# Altium PCB MIXR - Power.PcbDoc (part 1 of 4)
Units mm, origin at the board's own origin, x right, y up, seen from the top; angles counter-clockwise.
Board outline 109.43 x 109.43 mm, 2 copper layers (Top Layer, Bottom Layer), stack 1.569 mm thick; 131 components, 82 nets, 420 pads, 247 vias.
Unrouted connection lines stored in the file: 102.
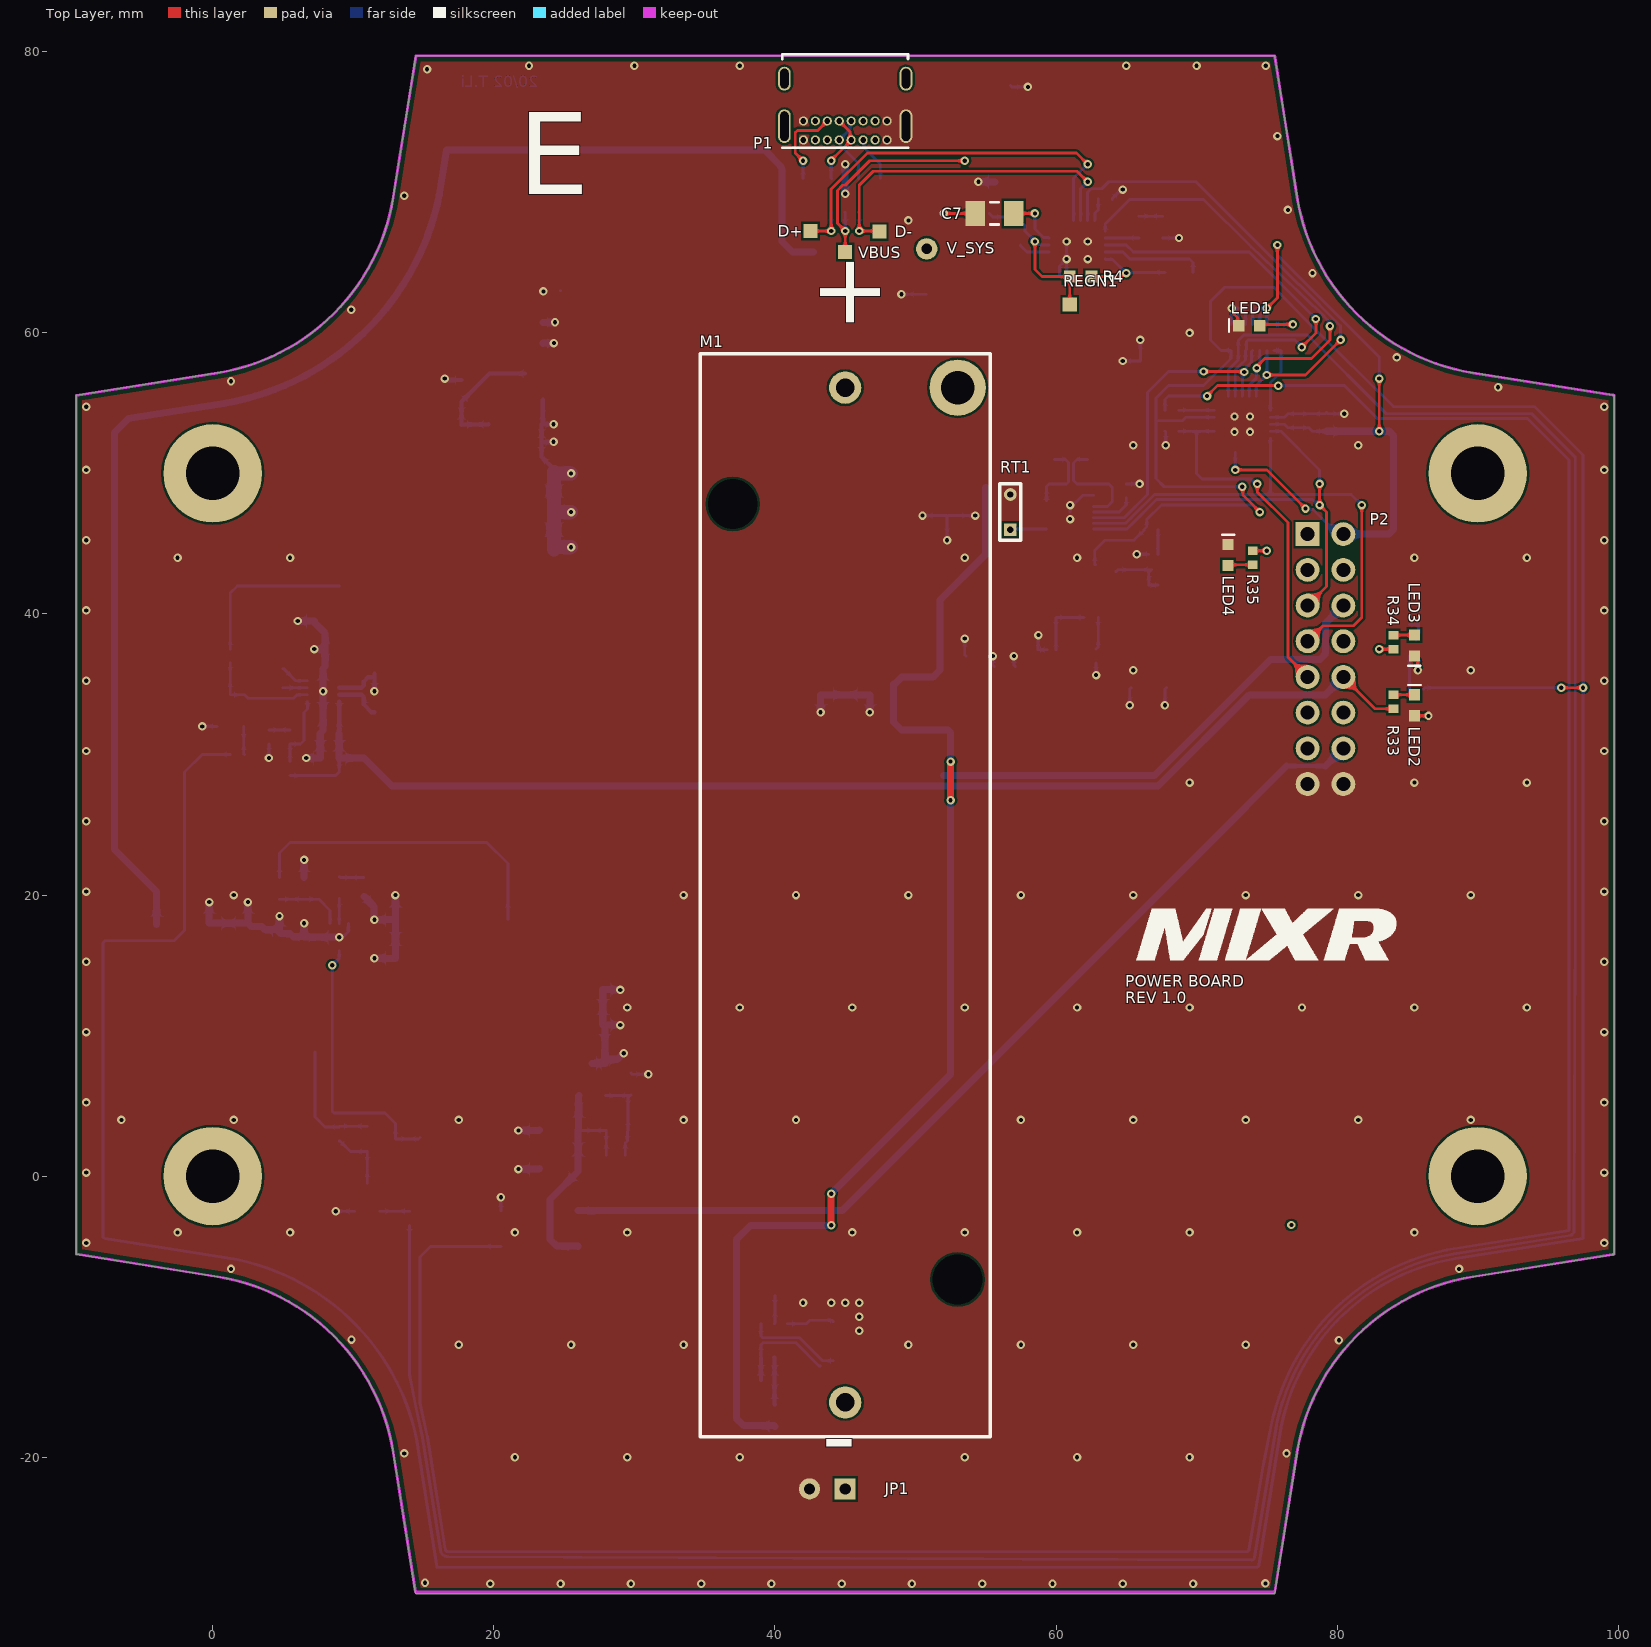
[diagram p0: Top Layer view]
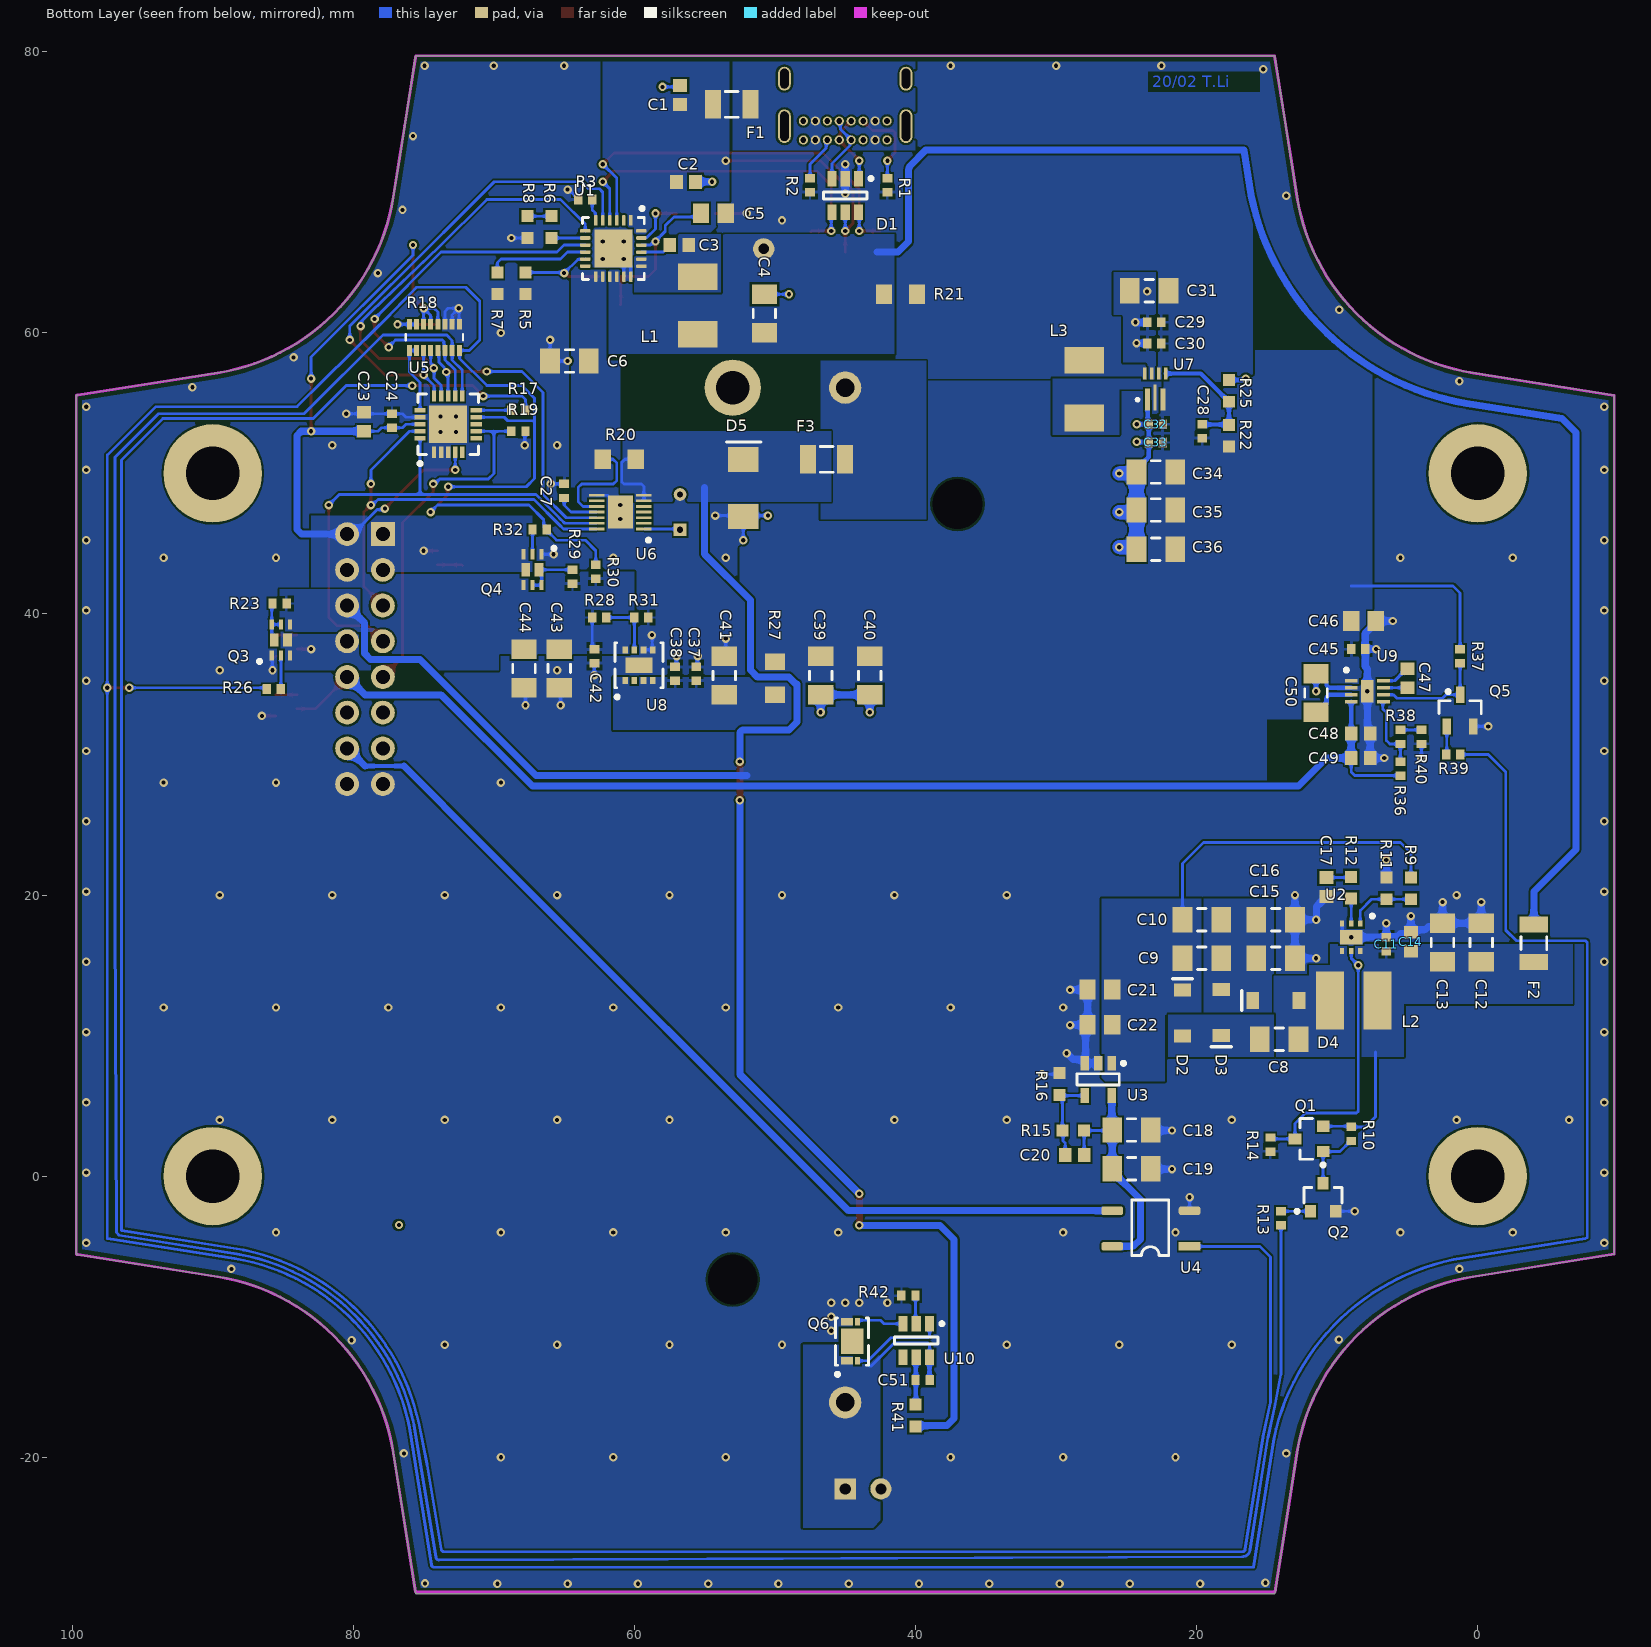
[diagram p1: Bottom Layer view, seen from below]
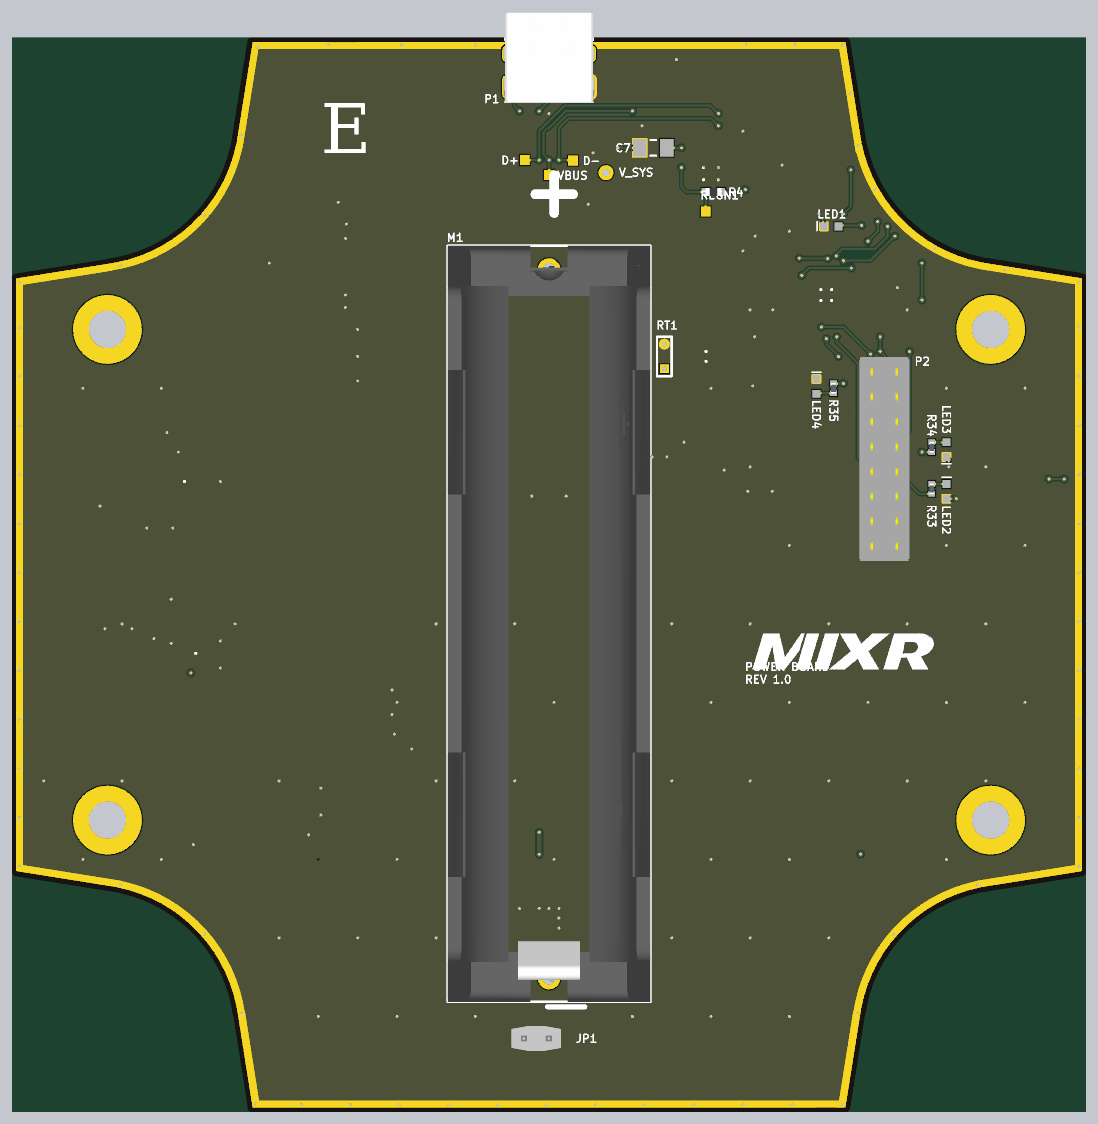
[diagram p3: 3D render of the assembled board from above, using the file's embedded part models]
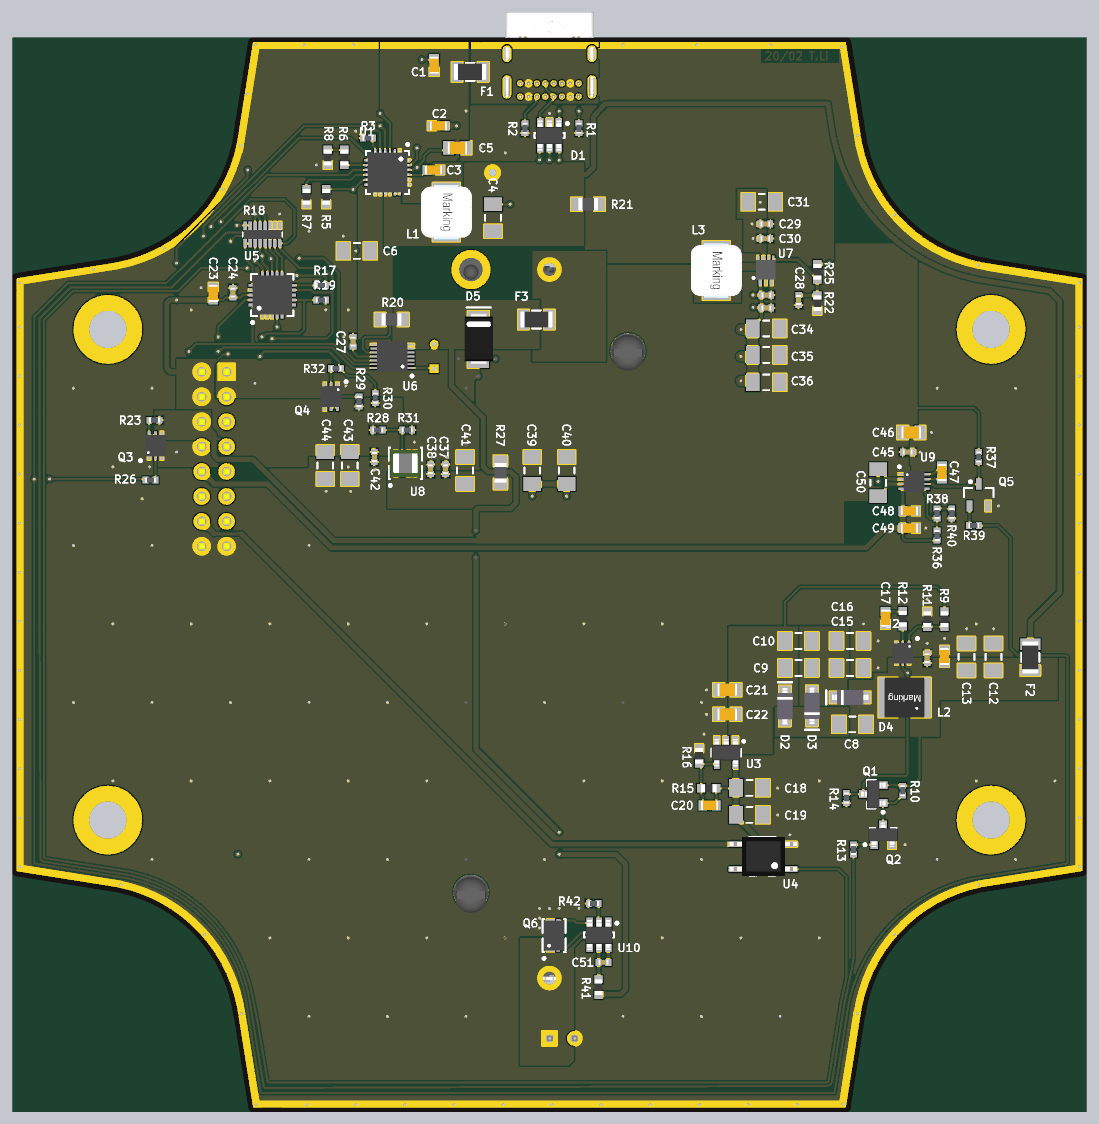
[diagram p4: 3D render of the assembled board from below, using the file's embedded part models]

## Layer stack, top to bottom
Top Solder: solder mask 0.0254, SM-001, Dk 4
Top Layer: signal copper 0.035
Dielectric 1: core 1.4986, Core-043, Dk 4.3
Bottom Layer: signal copper 0.035
Bottom Solder: solder mask 0.0254, SM-001, Dk 4

## Board outline
336 vertices, not listed, extent -9.713,-29.713 99.713,79.713

## Design rules (kind name [scope] priority, off if disabled: settings)
BoardOutlineClearance [All] p1: gap=0.406 ignorepadtopadclearanceinfootprint=FALSE
Clearance [All] p1: gap=0.152 ignorepadtopadclearanceinfootprint=TRUE except(0: Arc-Hole Track-Hole SMDPad-Hole THPad-Hole Via-Hole Fill-Hole Poly-Hole Region-Hole Text-Hole)
ComponentClearance ComponentClearance_ControllerBoard [InComponent('P1') vs Identifier = 'Controller_Board'] p1: gap=0 collisioncheckmode=3 verticalgap=0 showdistances=FALSE
ComponentClearance ComponentClearance_Standoffs [Identifier = 'Standoff' vs Identifier = 'Controller_Board'] p2: gap=0 collisioncheckmode=3 verticalgap=0 showdistances=FALSE
ComponentClearance [All] p3: gap=0.254 collisioncheckmode=3 verticalgap=0.254 showdistances=FALSE
DiffPairsRouting USB_90R [All] p1: maxlimit=0.4 minlimit=0.25 mostfreqgap=0.3 toplayer_minwidth=0.2 toplayer_maxwidth=0.35 toplayer_prefwidth=0.25 bottomlayer_minwidth=0.2 bottomlayer_maxwidth=0.35 bottomlayer_prefwidth=0.25 maxuncoupledlength=12.7
Height [All] p1: minheight=0 maxheight=30 prefheight=12.7
HoleSize [All] p1: absolutevalues=TRUE maxlimit=6.3 minlimit=0.3 maxpercent=80.000 minpercent=20.000
MinimumAnnularRing [All] p1: minimumring=0.12
MinimumSolderMaskSliver [All] p1 off: minsoldermaskwidth=0.1
PlaneConnect 0402 [(ObjectKind = 'Component') And ((Footprint = 'CAP 0402') or (Footprint  = 'RES 0402'))] p1: pad.planeconnectstyle=Relief pad.reliefexpansion=0.5 pad.reliefentries=4 pad.reliefconductorwidth=0.2 pad.reliefairgap=0.2 via.planeconnectstyle=Direct via.reliefexpansion=0.508 via.reliefentries=4 via.reliefconductorwidth=0.254 via.reliefairgap=0.254
PlaneConnect [All] p2: planeconnectstyle=Direct reliefexpansion=0.508 reliefentries=4 reliefconductorwidth=0.254 reliefairgap=0.254
PolygonConnect "Polygon 0402 Cap" [HasFootprint('CAP 0402')] p1: connectstyle=Relief reliefconductorwidth=0.2 reliefentries=4 polygonreliefangle="90 Angle" airgapwidth=0.2
PolygonConnect "Polygon 0402 Res" [HasFootprint('RES 0402')] p2: connectstyle=Relief reliefconductorwidth=0.2 reliefentries=4 polygonreliefangle="90 Angle" airgapwidth=0.2
PolygonConnect [All] p3: connectstyle=Direct reliefconductorwidth=0.254 reliefentries=4 polygonreliefangle="90 Angle" airgapwidth=0.254
RoutingVias [All] p1: holewidth=0.3 width=0.6 viastyle="Through Hole" minholewidth=0.3 minwidth=0.6 maxholewidth=0.711 maxwidth=1.27
SilkToSolderMaskClearance [IsPad] p1: minsilkscreentomaskgap=0.178 clearancetoexposedcopper=TRUE
SolderMaskExpansion [All] p1: expansion=0.102 istentingtop=FALSE
Width [All] p1: maxlimit=2.54 minlimit=0.154 preferedwidth=0.2
23 further rules are at their usual default settings.

## Classes and differential pairs
component class "U_MIXR Power - Port Expander": C23 C24 LED1 R18 R19 U5
component class "U_MIXR Power - Connectors": C1 D1 D+ D- F1 P1 P2 R1 R2 VBUS
component class "U_MIXR Power - Battery Management": C27 C51 D5 F3 JP1 M1 Q6 R20 R41 R42 RT1 U6 U10
component class "U_MIXR Power - Battery Charging": C2 C3 C4 C5 C6 C7 L1 R3 R4 R5 R6 R7 R8 REGN1 U1 V_SYS
component class "U_MIXR Power - 48V Phantom Power Supply": C8 C9 C10 C11 C12 C13 C14 C15 C16 C17 C18 C19 C20 C21 C22 D2 D3 D4 F2 L2 Q1 Q2 R9 R10 R11 R12 R13 R14 R15 R16 R17 U2 U3 U4
component class "U_MIXR Power - 5V & 3V3 Regulators": C28 C29 C30 C31 C32 C33 C34 C35 C36 C37 C38 C39 C40 C41 C42 C43 C44 C45 C46 C47 C48 C49 C50 L3 LED2 LED3 LED4 Q3 Q4 Q5 R21 R22 R23 R25 R26 R27 R28 R29 R30 R31 R32 R33 R34 R35 R36 R37 R38 R39 R40 U7 U8 U9

## Components (designator, comment, footprint, x,y, rotation, side; value= is the part's Value field where it differs from the comment)
C1 "CAP CER 0.1UF 50V 10% X7R 0603" "CAP, 0603" 56.75,76.925 r90 bottom
C2 "CAP CER 1UF 50V 10% X7R 0603" "CAP, 0603" 56.325,70.75 r180 bottom
C3 "CAP CER 0.047UF 10% 25V X7R 0603" "CAP, 0603" 56.802,66.25 r0 bottom
C4 "CAP CER 10uF 50V 20% X5R 1206" "CAP, 1206" 50.75,61.375 r90 bottom
C5 "CAP CER 4.7UF 50V 10% X5R 0805" "CAP, 0805" 54.375,68.5 r180 bottom value=4.7uF
C6 "CAP CER 10uF 50V 20% X5R 1206" "CAP, 1206" 64.625,58 r0 bottom
C7 "CAP CER 10uF 50V 20% X5R 1206" "CAP, 1206" 55.625,68.5 r180 top
C8 "CAP CER 1UF 100V X7R 1206" "CAP, 1206" 14.125,9.75 r0 bottom
C9 "CAP CER 2.2UF 100V ±20% X7R 1206" "CAP, 1206" 19.625,15.5 r180 bottom
C10 "CAP CER 2.2UF 100V ±20% X7R 1206" "CAP, 1206" 19.625,18.25 r180 bottom
C11 "CAP CER 0.1UF 16V X7R 0402" "CAP 0402" 6.5,16 r90 bottom
C12 "CAP CER 2.2UF 100V ±20% X7R 1206" "CAP, 1206" -0.25,16.625 r90 bottom
C13 "CAP CER 2.2UF 100V ±20% X7R 1206" "CAP, 1206" 2.5,16.625 r90 bottom
C14 "CAP CER 1UF 50V 10% X7R 0603" "CAP, 0603" 4.75,16.675 r90 bottom
C15 "CAP CER 2.2UF 100V ±20% X7R 1206" "CAP, 1206" 14.375,15.5 r180 bottom
C16 "CAP CER 2.2UF 100V ±20% X7R 1206" "CAP, 1206" 14.375,18.25 r180 bottom
C17 "CAP CER 10nF 50V 5% X7R 0603" "CAP, 0603" 10.75,20.575 r270 bottom
C18 "CAP CER 1UF 100V X7R 1206" "CAP, 1206" 24.625,3.28 r180 bottom
C19 "CAP CER 1UF 100V X7R 1206" "CAP, 1206" 24.625,0.53 r180 bottom
C20 "CAP CER 27PF 100V 5% C0G/NP0 0603" "CAP, 0603" 28.675,1.5 r0 bottom
C21 "CAP CER 0.1UF 100V 10% X7R 0805" "CAP, 0805" 26.875,13.28 r0 bottom
C22 "CAP CER 0.1UF 100V 10% X7R 0805" "CAP, 0805" 26.875,10.78 r0 bottom
C23 "CAP CER 1UF 50V 10% X7R 0603" "CAP, 0603" 79.25,53.675 r90 bottom
C24 "CAP CER 0.1UF 16V X7R 0402" "CAP 0402" 77.25,53.25 r90 bottom
C27 "CAP CER 0.47UF 10V X7R 0402" "CAP 0402" 65,48.25 r90 bottom
C28 "CAP CER 20PF 50V C0G/NPO 0402" "CAP 0402" 19.6,52.5 r90 bottom
C29 "CAP CER 0.1UF 16V X7R 0402" "CAP 0402" 22.5,60.75 r0 bottom
C30 "CAP CER 10nF 25V X7R 0402" "CAP 0402" 22.5,59.25 r0 bottom
C31 "CAP CER 10uF 50V 20% X5R 1206" "CAP, 1206" 23.375,63 r0 bottom
C32 "CAP CER 10nF 25V X7R 0402" "CAP 0402" 22.4,53.5 r0 bottom
C33 "CAP CER 0.1UF 16V X7R 0402" "CAP 0402" 22.4,52.2 r0 bottom
C34 "CAP CER 22UF 6.3V ±10% X7R 1206" "CAP, 1206" 22.9,50.1 r0 bottom
C35 "CAP CER 22UF 6.3V ±10% X7R 1206" "CAP, 1206" 22.9,47.4 r0 bottom
C36 "CAP CER 22UF 6.3V ±10% X7R 1206" "CAP, 1206" 22.9,44.6 r0 bottom
C37 "CAP CER 0.1UF 16V X7R 0402" "CAP 0402" 55.6,35.25 r90 bottom
C38 "CAP CER 10nF 25V X7R 0402" "CAP 0402" 57.1,35.25 r90 bottom
C39 "CAP CER 10uF 50V 20% X5R 1206" "CAP, 1206" 46.75,35.625 r270 bottom
C40 "CAP CER 10uF 50V 20% X5R 1206" "CAP, 1206" 43.25,35.625 r270 bottom
C41 "CAP CER 10uF 50V 20% X5R 1206" "CAP, 1206" 53.6,35.625 r90 bottom
C42 "CAP CER 0.1UF 16V X7R 0402" "CAP 0402" 62.85,37.5 r270 bottom
C43 "CAP CER 22UF 6.3V ±10% X7R 1206" "CAP, 1206" 65.35,36.125 r270 bottom
C44 "CAP CER 22UF 6.3V ±10% X7R 1206" "CAP, 1206" 67.85,36.125 r270 bottom
C45 "CAP CER 0.1UF 16V X7R 0402" "CAP 0402" 9,37.5 r180 bottom
C46 "CAP CER 4.7UF 50V 10% X5R 0805" "CAP, 0805" 8.125,39.5 r180 bottom value=4.7uF
C47 "CAP CER 1UF 50V 10% X7R 0603" "CAP, 0603" 5,35.425 r270 bottom
C48 "CAP CER 2.2UF 25V 10% X5R 0603" "CAP, 0603" 8.325,31.5 r180 bottom
C49 "CAP CER 2.2UF 25V 10% X5R 0603" "CAP, 0603" 8.325,29.75 r180 bottom
C50 "CAP CER 10uF 50V 20% X5R 1206" "CAP, 1206" 11.5,34.375 r90 bottom
C51 "CAP CER 0.1UF 16V X7R 0402" "CAP 0402" 40,-14.5 r180 bottom
D1 "DIODE TVS 5.25V 17V SOT23-6" SOT23-6 45,69.75 r270 bottom
D2 "DIODE SCHOTTKY 100V 1A SOD123FL" "DIODE SOD123" 21,13.25 r270 bottom
D3 "DIODE SCHOTTKY 100V 1A SOD123FL" "DIODE SOD123" 18.25,10 r90 bottom
D4 "DIODE SCHOTTKY 100V 1A SOD123FL" "DIODE SOD123" 16,12.5 r180 bottom
D5 "DIODE TVS 5VWM 9.1VC DO-214AA (SMB)" "DO-214AA Diode" 52.25,46.936 r90 bottom
D+ "Test Point" "Test Point" 42.525,67.25 r90 top (schematic designator D+1)
D- "Test Point" "Test Point" 47.425,67.2 r90 top (schematic designator D-1)
F1 "FUSE 2.5A 32VDC 1206" "FUSE LITTLEFUSE 0466 1206" 53.08,76.25 r0 bottom
F2 "375 mA" "FUSE LITTLEFUSE 0466 1206" -4,16.58 r270 bottom
F3 "FUSE 5A 32VDC 1206" "FUSE LITTLEFUSE 0466 1206" 46.33,51 r0 bottom
JP1 "JUMPER" "CONN, 2POS JUMPER 0.1\"" 45,-22.25 r180 top
L1 "IND 1UH 5.3A 20 MOHM SMD" "IND 1UH 5.3A 20 MOHM 5020" 55.5,61.95 r270 bottom
L2 "IND 22UH 1.7A 280 MOHM SMD" "IND 22UH 1.7A 280MOHM SMD" 8.815,12.5 r0 bottom
L3 "IND 1UH 5.3A 20 MOHM SMD" "IND 1UH 5.3A 20 MOHM 5020" 28,56 r270 bottom
LED1 "LED BLUE CLEAR 2.8V 0603" LED_0603 74.45,60.51 r180 top
LED2 "LED GREEN CLEAR 2V 0603" LED_0603 85.51,32.8 r90 top
LED3 "LED GREEN CLEAR 2V 0603" LED_0603 85.49,38.45 r270 top
LED4 "LED GREEN CLEAR 2V 0603" LED_0603 72.25,43.5 r90 top
M1 "PROTECTED 18650" "BATTERY HOLDER 18650 PC PIN" 45,20 r90 top locked
P1 "CONN RECPT USB2.0 TYPE-C 16POS" "CONN RECPT USB2.0 TYPE C 16-POS" 45,77.75 r180 top
P2 "CONN 16POS HEADER 0.1\" 0.435\" FEMALE" "CONN, 16POS 0.100\" 0.435\" FEMALE" 77.9,45.68 r270 top locked
Q1 "MOSFET P-CH 30V 3.8A SOT-23" "MOSFET P-CH 30V 3.8A SOT-23" 12,2.65 r0 bottom
Q2 "MOSFET N-CH 30V 6.2A 0.9W SOT-23" "MOSFET N-CH 30V 6.2A 0.9W SOT-23" 11,-1.5 r90 bottom
Q3 "MOSFET N/P-CH 12V 4.5A SC-70-6" "MOSFET N/P-CH 12V 4.5A SC-70-6" 85.15,38.15 r90 bottom
Q4 "MOSFET N/P-CH 12V 4.5A SC-70-6" "MOSFET N/P-CH 12V 4.5A SC-70-6" 67.25,43.15 r270 bottom
Q5 "MOSFET N-CH 60V 310MA SOT23" SOT23 1.25,33.125 r90 bottom
Q6 "MOSFET 2N-CH 20V 9A 6-UDFN" "MOSFET 2N-CH 6-UDFN" 44.5,-11.75 r90 bottom
R1 "RES 5.1K OHM 1% 1/16W 0402" "RES 0402" 42,71 r270 bottom
R2 "RES 5.1K OHM 1% 1/16W 0402" "RES 0402" 47.5,71 r270 bottom
R3 "RES 10K OHM 1% 1/16W 0402" "RES 0402" 64,69.5 r180 bottom
R4 "RES 10K OHM 1% 1/10W 0603" "RES, 0603" 61.75,64 r0 top
R5 "RES 10K OHM 1% 1/10W 0603" "RES, 0603" 67.75,63.525 r270 bottom
R6 "RES 220 OHM 1% 1/10W 0603" "RES, 0603" 65.9,67.525 r90 bottom
R7 "RES 330 OHM 1% 1/10W 0603" "RES, 0603" 69.75,63.525 r270 bottom value=330
R8 "RES 40.2 OHM 0.5% 1/10W 0603" "RES, 0603" 67.6,67.525 r270 bottom
R9 "RES 390K OHM 1% 1/10W 0603" "RES, 0603" 4.75,20.475 r270 bottom
R10 "RES 162K OHM 1% 1/16W 0402" "RES 0402" 9,3.5 r270 bottom
R11 "RES 10K OHM 1% 1/10W 0603" "RES, 0603" 6.5,20.475 r90 bottom
R12 "RES 10K OHM 1% 1/10W 0603" "RES, 0603" 9,20.525 r90 bottom
R13 "RES 22.1 OHM 1% 1/16W 0402" "RES 0402" 14,-3.5 r90 bottom
R14 "RES 162K OHM 1% 1/16W 0402" "RES 0402" 14.75,2.75 r270 bottom
R15 "RES 1M OHM 0.1% 1/10W 0603" "RES, 0603" 28.775,3.25 r0 bottom
R16 "RES 26.7K OHM 0.1% 1/10W 0603" "RES, 0603" 29.75,6.555 r90 bottom
R17 "RES 1K OHM 0.1% 1/16W 0402" "RES 0402" 68.75,54.5 r180 bottom
R18 "RES ARRAY 10K OHM 5% 8RES" "RES ARRAY, 8 POS 1506" 74.238,59.677 r270 bottom value=Value
R19 "RES 10K OHM 1% 1/16W 0402" "RES 0402" 67.75,53 r0 bottom
R20 "RES 0.005 OHM 1% 1/2W 0805" "RES CRF0805" 59.9,51 r0 bottom
R21 "RES 0.005 OHM 1% 1/2W 0805" "RES CRF0805" 42.25,62.75 r180 bottom
R22 "RES 750K OHM 1% 1/16W 0402" "RES, 0603" 17.7,52.675 r90 bottom
R23 "RES 10K OHM 1% 1/16W 0402" "RES 0402" 84.75,40.75 r0 bottom
R25 "RES 100K OHM 0.1% 1/16W 0402" "RES, 0603" 17.7,55.875 r90 bottom
R26 "RES 22.1 OHM 1% 1/16W 0402" "RES 0402" 86.15,34.65 r180 bottom
R27 "RES 0.005 OHM 1% 1/2W 0805" "RES CRF0805" 50,36.6 r270 bottom
R28 "RES 523K OHM 1% 1/16W 0402" "RES 0402" 63,39.75 r180 bottom
R29 "RES 10K OHM 1% 1/16W 0402" "RES 0402" 64.4,42.15 r90 bottom
R30 "RES 10K OHM 1% 1/16W 0402" "RES 0402" 62.75,42.5 r90 bottom
R31 "RES 162K OHM 1% 1/16W 0402" "RES 0402" 60,39.75 r180 bottom
R32 "RES 22.1 OHM 1% 1/16W 0402" "RES 0402" 66.25,46 r0 bottom
R33 "RES 4.7K OHM 1% 1/10W 0402" "RES 0402" 84,33.25 r90 top
R34 "RES 4.7K OHM 1% 1/10W 0402" "RES 0402" 84,37.5 r90 top
R35 "RES 4.7K OHM 1% 1/10W 0402" "RES 0402" 74,44.5 r270 top
R36 "RES 523K OHM 1% 1/16W 0402" "RES 0402" 5.5,28.5 r90 bottom
R37 "RES 10K OHM 1% 1/16W 0402" "RES 0402" 1.25,37.5 r270 bottom
R38 "RES 162K OHM 1% 1/16W 0402" "RES 0402" 5.5,30.75 r90 bottom
R39 "RES 22.1 OHM 1% 1/16W 0402" "RES 0402" 1.25,30 r0 bottom
R40 "RES 10K OHM 1% 1/16W 0402" "RES 0402" 4,31.75 r270 bottom
R41 "RES 330 OHM 1% 1/10W 0603" "RES, 0603" 40,-17.025 r90 bottom
R42 "RES 2.7K OHM 1% 1/16W 0402" "RES 0402" 40,-8.5 r0 bottom
REGN1 "Test Point" "Test Point" 60.975,62.025 r90 top
RT1 "10K NTC" "NTC THERMISTOR BEAD" 56.75,46 r90 top
U1 "IC BATT CHG LI-ION 1 CELL 24-VQFN" "IC BATT CHG LI-ION 1 CELL 24-VQFN" 61.5,66 r270 bottom
U2 "IC REG BOOST 38V 1.2A 6-WDFN" QFN65P200X200X80_HS-7M 9,17 r270 bottom
U3 "IC REG LDO 80V ADJ 20MA SOT23-5" SOT95P280X145-5N 27,6.88 r270 bottom
U4 "CPC1017N" "RELAY SOP4" 20.5,-5 r0 bottom
U5 "MCP23008" QFN50P400X400X100_HS-21M 73.25,53.5 r90 bottom
U6 "IC BATT FUEL GAUGE LI-ION 14-DFN" QFN40P300X300X80_HS-15M 61,47.25 r0 bottom
U7 "IC REG BOOST 8A VQFN" "IC REG BOOST 8A VQFN=HR" 22.95,56.175 r90 bottom
U8 "IC DCDC 0.8-6V 2A 8-uSIP" "IC DCDC 0.8-6V 2A 8-uSIP" 59.675,36.35 r90 bottom
U9 "IC REG INV CHARGE PUMP ADJ 8-WSON" QFN50P200X200X80_HS-9M 7.85,34.5 r180 bottom
U10 "IC BATT PROT LI-ION 1-CELL SOT26" SOT23-6 39.955,-11.729 r270 bottom
V_SYS "Thru Test Point" "Thru Test Point" 50.8,65.975 r90 top (schematic designator VBAT_PROT1)
VBUS "Test Point" "Test Point" 45,65.75 r90 top (schematic designator VUSB1)

## Footprints (in the part's own frame and the unit in brackets; to place one, negate y for a bottom-side part, rotate by r counter-clockwise, add the part's x,y. Pads: shape width x height; smd on the part's side, far side on the other; paste and mask are expansions set on the pad)
"BATTERY HOLDER 18650 PC PIN" [mm]
  round 2.3 hole 1.32: 1(36.1,0) 2(-36.1,0)
  round 0 hole 3.55: 6(-27.36,-8)
  oval 3.55x0.55 hole 3.55: 6(27.82,8)
  round 4 hole 2.39: 6(36.1,-8)
  silkscreen extent -38.53,-10.32 38.53,10.33, body extent -38.53,-10.32 38.53,10.33, height 14.86
"CAP 0402" [mm]
  rect 0.6x0.7 smd: 1(0,0) 2(1,0)
  body extent 0,-0.25 1,0.27, height 0.51
"CAP, 0603" [mm] "Chip Capacitor, 2-Leads, Body 1.60x0.81mm, IPC Medium Density"
  rect 0.9x1 smd mask+0.076: 1(-0.675,0) 2(0.675,0)
  body extent -0.88,-0.48 0.87,0.48, height 0.9
"CAP, 0805" [mm] "Chip Capacitor, 2-Leads, Body 2.00x1.25mm, IPC Medium Density"
  rect 1.15x1.4 smd: 1(-0.875,0) 2(0.875,0)
  body extent -1,-0.63 1,0.63, height 1.25
"CAP, 1206" [mm] "Chip Capacitor, 2-Leads, Body 3.20x1.60mm, IPC Medium Density"
  rect 1.4x1.8 smd: 1(-1.375,0) 2(1.375,0)
  silkscreen extent -0.3,-0.8 0.3,0.8, body extent -1.68,-0.87 1.67,0.87, height 1.8
"CONN RECPT USB2.0 TYPE C 16-POS" [mm] "USB 2.0 Type C Receptacle Dip Type, PCB Top Mount"
  round 0.65 hole 0.4: A1(-2.975,4.025) A4(-2.125,4.025) A5(-1.275,4.025) A6(-0.425,4.025) A7(0.425,4.025) A8(1.275,4.025) A9(2.125,4.025) A12(2.975,4.025) B1(2.975,2.675) B4(2.125,2.675) B5(1.275,2.675) B6(0.425,2.675) B7(-0.425,2.675) B8(-1.275,2.675) B9(-2.125,2.675) B12(-2.975,2.675)
  oval 0.9x2.4 hole 0.6 slot 2.1 at 90 deg: P1(-4.325,3.045) P2(4.325,3.045)
  oval 0.9x1.7 hole 0.6 slot 1.4 at 90 deg: P3(4.325,-0.335) P4(-4.325,-0.335)
  silkscreen extent -4.47,-2.07 4.47,4.58, body extent -4.51,-4.56 4.52,4.61, height 3.46
"CONN, 2POS JUMPER 0.1\"" [mm]
  rect 1.5x1.5 hole 0.8: 1(0,0)
  round 1.5 hole 0.8: 2(2.54,0)
  body extent -1.24,-1.27 3.84,1.27, height 9.25
"CONN, 16POS 0.100\" 0.435\" FEMALE" [mm]
  rect 1.7x1.7 hole 1: 1(0,0)
  round 1.7 hole 1: 2(2.54,0) 3(5.08,0) 4(7.62,0) 5(10.16,0) 6(12.7,0) 7(15.24,0) 8(17.78,0) 9(17.78,2.54) 10(15.24,2.54) 11(12.7,2.54) 12(10.16,2.54) 13(7.62,2.54) 14(5.08,2.54) 15(2.54,2.54) 16(0,2.54)
  body extent -1.52,-1.27 19.3,3.81, height 11.01
"DIODE SOD123" [mm]
  rect 0.91x1.22 smd: 1(0,0) 2(3.28,0)
  silkscreen extent -0.8,-0.7 -0.8,0.7, body extent -0.21,-0.77 3.49,0.77, height 1.23
"DO-214AA Diode" [mil] "Zener Diode 16V 5W SMBJ5353B-TP"
  rect 70x85 smd: 1(0,0) 2(160,0)
  silkscreen extent 209,-50 209,47, body extent -21,-60 187,55, height 95
"FUSE LITTLEFUSE 0466 1206" [mm]
  rect 1.14x2.03 smd: 1(-1.33,0) 2(1.33,0)
  silkscreen extent -0.45,-0.92 0.45,0.91, body extent -1.65,-0.83 1.65,0.82, height 0.6
"IC BATT CHG LI-ION 1 CELL 24-VQFN" [mm]
  rect 0.75x0.25 smd: 1(-2,1.25)
  rrect50% 0.75x0.25 smd: 2(-2,0.75) 3(-2,0.25) 4(-2,-0.25) 5(-2,-0.75) 6(-2,-1.25) 13(2,-1.25) 14(2,-0.75) 15(2,-0.25) 16(2,0.25) 17(2,0.75) 18(2,1.25)
  rrect50% 0.25x0.75 smd: 7(-1.25,-2) 8(-0.75,-2) 9(-0.25,-2) 10(0.25,-2) 11(0.75,-2) 12(1.25,-2) 19(1.25,2) 20(0.75,2) 21(0.25,2) 22(-0.25,2) 23(-0.75,2) 24(-1.25,2)
  rect 2.7x2.7 smd: 25(0,0)
  silkscreen extent -2.97,-2.2 2.2,2.2, body extent -2.13,-2.13 2.13,2.13, height 1
"IC DCDC 0.8-6V 2A 8-uSIP" [mm]
  rect 0.5x0.4 smd: 1(-1.1,0.975) 2(-1.1,0.325) 3(-1.1,-0.325) 4(-1.1,-0.975) 5(1.1,-0.975) 6(1.1,-0.325) 7(1.1,0.325) 8(1.1,0.975)
  rect 1.1x1.9 smd: 9(0,0)
  silkscreen extent -2.37,-1.7 1.6,1.7, body extent -1.4,-1.5 1.4,1.5, height 1.31
"IC REG BOOST 8A VQFN=HR" [mm]
  rect 1.55x0.35 smd: 1(-0.925,0.55) 3(-0.925,-0.55)
  rect 1.85x0.2 smd: 2(-0.775,0)
  rect 0.85x0.254 smd: 4(0.925,-0.75) 5(0.925,-0.25) 6(0.925,0.25) 7(0.925,0.75)
  silkscreen extent -1.02,1.15 -0.83,1.35, body extent -1.11,-1 0.89,1, height 1
"IND 1UH 5.3A 20 MOHM 5020" [mm]
  rect 1.9x2.8 smd: 1(-2.05,0) 2(2.05,0)
  body extent -2.85,-2.6 2.85,2.6, height 1.8
"IND 22UH 1.7A 280MOHM SMD" [mm] "SMT Shielded Power Inductor, body 4.1x4.1mm"
  rect 1.98x4.1 smd: 1(-1.685,0) 2(1.685,0)
  body extent -2.05,-2.05 2.05,2.05, height 2.1
LED_0603 [mm]
  rect 0.8x0.8 smd: 1(-0.05,0.01) 2(1.45,0.01)
  silkscreen extent 2.13,-0.46 2.13,0.45, body extent -0.09,-0.39 1.51,0.41, height 0.8
"MOSFET 2N-CH 6-UDFN" [mm]
  rect 0.53x0.85 smd: 1(-1.385,0.375) 4(1.385,0.375)
  rect 0.53x0.35 smd: 2(-1.385,-0.375) 3(1.385,-0.375)
  rect 1.8x1.6 smd: 5(0,0)
  silkscreen extent -2.47,-1.15 1.65,1.2, body extent -1.55,-1 1.5,1.05, height 0.6
"MOSFET N-CH 30V 6.2A 0.9W SOT-23" [mm] "SOT23, 3-Leads, Body 2.90x2.40mm, Pitch 0.90mm, IPC Medium Density"
  rect 0.9x0.8 smd: 1(-1,0.9) 2(-1,-0.9) 3(1,0)
  silkscreen extent -1.12,-1.35 0.7,1.98, body extent -1.25,-1.5 1.25,1.5, height 1.1
"MOSFET N/P-CH 12V 4.5A SC-70-6" [mm] "QFN, 6-Leads, Body 2.07x2.07mm, Pitch 0.65mm, Thermal Pad 0.95x1.23mm, IPC Low Density"
  rect 0.725x0.3 smd: 1(-1.1,0.65) 2(-1.1,0) 3(-1.1,-0.65) 4(1.1,-0.65) 5(1.1,0) 6(1.1,0.65)
  rect 0.95x0.613 smd: 3(0,-0.466) 6(0,0.466)
  silkscreen extent -1.65,1.4 -1.4,1.65, body extent -1.08,-1.07 1.08,1.08, height 0.8
"MOSFET P-CH 30V 3.8A SOT-23" [mm] "SOT23, 3-Leads, Body 2.85x2.40mm, Pitch 0.90mm, IPC Medium Density"
  rect 0.9x0.8 smd: 1(-1,0.9) 2(-1,-0.9) 3(1,0)
  silkscreen extent -1.12,-1.45 0.65,1.97, body extent -1.25,-1.45 1.25,1.45, height 1.1
"NTC THERMISTOR BEAD" [mm] "NTC Thermistor 10k Bead"
  rect 0.9x0.9 hole 0.45: 1(0,0)
  round 0.9 hole 0.45: 2(2.5,0)
  silkscreen extent -0.75,-0.75 3.25,0.75
QFN40P300X300X80_HS-15M [mm] "QFN, 14-Leads, Body 3.00x3.00mm, Pitch 0.40mm, Thermal Pad 1.78x2.35mm, IPC Low Density"
  rect 1.1x0.2 smd: 1(-1.675,1.2) 2(-1.675,0.8) 3(-1.675,0.4) 4(-1.675,0) 5(-1.675,-0.4) 6(-1.675,-0.8) 7(-1.675,-1.2) 8(1.675,-1.2) 9(1.675,-0.8) 10(1.675,-0.4) 11(1.675,0) 12(1.675,0.4) 13(1.675,0.8) 14(1.675,1.2)
  rect 1.78x2.35 smd: 15(0,0)
  silkscreen extent -2.12,1.88 -1.88,2.12, body extent -1.55,-1.55 1.55,1.55, height 0.8
QFN50P200X200X80_HS-9M [mm] "QFN, 8-Leads, Body 2.00x2.00mm, Pitch 0.50mm, Thermal Pad 0.90x1.60mm, IPC Low Density"
  rect 0.9x0.25 smd: 1(-1.15,0.75) 2(-1.15,0.25) 3(-1.15,-0.25) 4(-1.15,-0.75) 5(1.15,-0.75) 6(1.15,-0.25) 7(1.15,0.25) 8(1.15,0.75)
  rect 0.9x1.6 smd: 9(0,0)
  silkscreen extent -1.63,1.38 -1.38,1.62, body extent -1.05,-1.05 1.05,1.05, height 0.8
QFN50P400X400X100_HS-21M [mm] "QFN, 20-Leads, Body 4.00x4.00mm, Pitch 0.50mm, Thermal Pad 2.70x2.70mm, IPC Low Density"
  rect 0.8x0.3 smd: 1(-2,1) 2(-2,0.5) 3(-2,0) 4(-2,-0.5) 5(-2,-1) 11(2,-1) 12(2,-0.5) 13(2,0) 14(2,0.5) 15(2,1)
  rect 0.3x0.8 smd: 6(-1,-2) 7(-0.5,-2) 8(0,-2) 9(0.5,-2) 10(1,-2) 16(1,2) 17(0.5,2) 18(0,2) 19(-0.5,2) 20(-1,2)
  rect 2.7x2.7 smd: 21(0,0)
  silkscreen extent -2.92,-2.15 2.15,2.15, body extent -2,-2 2,2, height 1
QFN65P200X200X80_HS-7M [mm] "QFN, 6-Leads, Body 2.00x2.00mm, Pitch 0.65mm, Thermal Pad 1.00x1.60mm, IPC Low Density"
  rect 0.45x0.3 smd: 1(-0.975,0.65) 2(-0.975,0) 3(-0.975,-0.65) 4(0.975,-0.65) 5(0.975,0) 6(0.975,0.65)
  rect 1x1.6 smd: 7(0,0)
  silkscreen extent -1.62,1.37 -1.38,1.62, body extent -1.05,-1.05 1.05,1.05, height 0.8
"RELAY SOP4" [mm]
  rect 1.54x0.6 smd: 1(0,0)
  rrect50% 1.54x0.6 smd: 2(0,-2.54) 3(5.5,-2.54) 4(5.5,0)
  silkscreen extent 1.48,-3.3 4.12,0.65, body extent -0.73,-3.3 6.13,0.7, height 2.02
"RES 0402" [mm]
  rect 0.6x0.7 smd: 1(0,0) 2(1,0)
  body extent -0.05,-0.25 1.05,0.25, height 0.32
"RES ARRAY, 8 POS 1506" [mil]
  rect 30x14 smd: 1(-36.5,70) 2(-36.5,50) 3(-36.5,30) 4(-36.5,10) 5(-36.5,-10) 6(-36.5,-30) 7(-36.5,-50) 8(-36.5,-70) 9(36.5,-70) 10(36.5,-50) 11(36.5,-30) 12(36.5,-10) 13(36.5,10) 14(36.5,30) 15(36.5,50) 16(36.5,70)
  silkscreen extent -9,-80 9,80, body extent -21,-77 21,77, height 18
"RES CRF0805" [mm]
  rect 1.15x1.4 smd: 1(0,0) 2(2.35,0)
  body extent 0.2,-0.62 2.2,0.63, height 0.8
"RES, 0603" [mm] "Chip Resistor, 2-Leads, Body 1.60x0.80mm, IPC Medium Density"
  rect 0.85x0.85 smd: 1(-0.775,0) 2(0.775,0)
  body extent -0.8,-0.4 0.8,0.4, height 0.55
SOT23 [mm] "SOT23, 3-Leads, Body 2.9x1.3mm, Pitch 0.95mm, Lead Span 2.3mm - Reverse Pinning, IPC Medium Density"
  rect 1.15x0.6 smd: 1(1.125,0) 2(-1.125,-0.95) 3(-1.125,0.95)
  silkscreen extent -0.2,-1.5 1.47,1.5, body extent -0.7,-1.5 0.7,1.5, height 1.1
SOT23-6 [mm]
  rect 1.1x0.65 smd: 1(-1.229,0.955) 2(-1.229,0.005) 3(-1.229,-0.945) 4(1.171,-0.945) 5(1.171,0.005) 6(1.171,0.955)
  silkscreen extent -1.35,-1.54 0.22,1.95, body extent -1.52,-1.37 1.53,1.38, height 1.1
SOT95P280X145-5N [mm] "SOT23, 5-Leads, Body 2.95x2.80mm, Pitch 0.95mm, IPC Medium Density"
  rect 1.05x0.6 smd: 1(-1.15,0.95) 2(-1.15,0) 3(-1.15,-0.95) 4(1.15,-0.95) 5(1.15,0.95)
  silkscreen extent -1.27,-1.5 0.4,1.92, body extent -1.4,-1.47 1.4,1.47, height 1.45
"Test Point" [mm]
  rect 1x1 smd paste-2: TP(0,0)
"Thru Test Point" [mil]
  round 60 hole 30: TH_TP(0,0)

## Part data
C1: "0.10µF ±10% 50V Ceramic Capacitor X7R 0603 (1608 Metric)", Capacitance=0.1µF, Manufacturer 1="AVX Corporation", Manufacturer Part Number 1=06035C104KAT2A, Operating Temperature="-55°C ~ 125°C", Package / Case="0603 (1608 Metric)", Ratings=-, Supplier Part Number 1=478-5052-1-ND, Temperature Coefficient=X7R, Tolerance=±10%, Voltage=50V, ComponentLink1Description=http://datasheets.avx.com/X7RDielectric.pdf, ComponentLink1URL=http://datasheets.avx.com/X7RDielectric.pdf, Height - Seated (Max)=-, Lead Spacing=-, Lead Style=-, Mounting Type="Surface Mount, MLCC", Packaging="Cut Tape (CT)", Part Status=Active, Size / Dimension="0.063\" L x 0.032\" W (1.60mm x 0.81mm)", Supplier 1=Digi-Key, Thickness (Max)="0.035\" (0.90mm)"
C2 C14 C23 C47: "1µF ±10% 50V Ceramic Capacitor X7R 0603 (1608 Metric)", Capacitance=1µF, Manufacturer 1="Taiyo Yuden", Manufacturer Part Number 1=UMK107AB7105KA-T, Operating Temperature="-55°C ~ 125°C", Package / Case="0603 (1608 Metric)", Ratings=-, Supplier Part Number 1=587-3247-1-ND, Temperature Coefficient=X7R, Tolerance=±10%, Voltage=50V, ComponentLink1Description=http://www.yuden.co.jp/productdata/catalog/en/mlcc_all_e.pdf, ComponentLink1URL=http://www.yuden.co.jp/productdata/catalog/en/mlcc_all_e.pdf, Height - Seated (Max)=-, Lead Spacing=-, Lead Style=-, Mounting Type="Surface Mount, MLCC", Packaging="Cut Tape (CT)", Part Status=Active, Size / Dimension="0.063\" L x 0.031\" W (1.60mm x 0.80mm)", Supplier 1=Digi-Key, Thickness (Max)="0.037\" (0.95mm)"
C3: "0.047µF ±10% 25V Ceramic Capacitor X7R 0603 (1608 Metric)", Capacitance=47nF, Case/Package=0603, Dielectric=X7R, Dielectric Material=Ceramic, Manufacturer=KEMET, Manufacturer Part Number=C0603C473K3RACTU, Max Operating Temperature=125°C, Min Operating Temperature=-55°C, Supplier Part Number 1=399-7931-1-ND, Tolerance=10%, Voltage=25V, ComponentLink1Description=https://datasheet.ciiva.com/28682/1851736-28682293.pdf?src-supplier=Element14, ComponentLink1URL=https://datasheet.ciiva.com/28682/1851736-28682293.pdf?src-supplier=Element14, ComponentLink2Description=https://datasheet.ciiva.com/28584/1918693-28584138.pdf?src-supplier=Element14, ComponentLink2URL=https://datasheet.ciiva.com/28584/1918693-28584138.pdf?src-supplier=Element14, ComponentLink3Description=https://datasheet.ciiva.com/46445/1851736-46445227.pdf?src-supplier=Element14, ComponentLink3URL=https://datasheet.ciiva.com/46445/1851736-46445227.pdf?src-supplier=Element14, ComponentLink4Description=https://datasheet.ciiva.com/18193/getdatasheetpartid-330260-18193100.pdf?src-supplier=Verical, ComponentLink4URL=https://datasheet.ciiva.com/18193/getdatasheetpartid-330260-18193100.pdf?src-supplier=Verical, ComponentLink5Description=https://datasheet.ciiva.com/7824/kem-c1002-x7r-smd-7824045.pdf?src-supplier=Element14, ComponentLink5URL=https://datasheet.ciiva.com/7824/kem-c1002-x7r-smd-7824045.pdf?src-supplier=Element14, Contact Plating=Tin, Depth=0.8mm, Height=0.8mm, Length=1.6mm, Mount="Surface Mount", Packaging="Tape and Reel", Pricing 1="1 = 0.11000, 10 = 0.07800, 100 = 0.03650, 500 = 0.02562, 1000 = 0.02121 (USD)", Radiation Hardening=No, RoHS=Yes, Stock 1=1163581, Supplier 1=Digi-Key, Termination=SMD/SMT, Voltage Rating (DC)=25V
C4 C6 C7 C31 C39 C40 C41 C50: "10µF ±20% 50V Ceramic Capacitor X5R 1206 (3216 Metric)", Capacitance="10 uF", Case Code (Imperial)=1206, Case Code (Metric)=3216, Manufacturer=Murata, Manufacturer Part Number=GRT31CR61H106ME01L, Max Operating Temperature=85°C, Min Operating Temperature=-55°C, Rating=X5R, Ratings=AEC-Q200, Supplier Part Number 1=490-12457-1-ND, Tolerance=20%, Voltage Rating=50V, Case/Package=1206, Length=0.126inch, Mount="Surface Mount", Packaging="Tape and Reel", Pricing 1="1 = 0.57000, 10 = 0.39800, 100 = 0.23910, 500 = 0.17930, 1000 = 0.15141 (USD)", RoHS=Yes, Stock 1=449467, Supplier 1=Digi-Key, Thickness=0.071inch, Width=0.063inch
C5 C46: "4.7µF ±20% 50V Ceramic Capacitor X5R 0805 (2012 Metric)", Manufacturer 1="Murata Electronics North America", Manufacturer Part Number 1=GRT21BR61H475ME13L, Operating Temperature="-55°C ~ 85°C", Package / Case="0805 (2012 Metric)", Ratings=AEC-Q200, Supplier Part Number 1=490-12395-1-ND, Temperature Coefficient=X5R, Tolerance=±20%, Voltage - Rated=50V, Applications=Automotive, Category=Capacitors, ComponentLink1Description=http://search.murata.co.jp/Ceramy/image/img/A01X/G101/ENG/GRT21BR61H475ME13-01.pdf, ComponentLink1URL=http://search.murata.co.jp/Ceramy/image/img/A01X/G101/ENG/GRT21BR61H475ME13-01.pdf, Description 1="CAP CER 4.7UF 50V X5R 0805", Features=-, Height - Seated (Max)=-, Lead Spacing=-, Lead Style=-, Mounting Type="Surface Mount, MLCC", Packaging="Cut Tape (CT)", Part Status=Active, Pricing 1="1=0.56, 10=0.389, 100=0.2338, 500=0.17536, 1000=0.14808 (CAD)", RoHS="RoHS Compliant", Size / Dimension="0.079\" L x 0.049\" W (2.00mm x 1.25mm)", Stock 1=4286, Supplier 1=Digi-Key, Thickness (Max)="0.057\" (1.45mm)"
C8 C18 C19: "Cap Ceramic 1uF 100V X7R 10% SMD 1206 125C Embossed T/R", Capacitance=1uF, Case Code (Imperial)=1206, Case Code (Metric)=3216, Dielectric=X7R, Manufacturer=Samsung, Manufacturer Part Number=CL31B105KCHNNNE, Max Operating Temperature=125°C, Min Operating Temperature=-55°C, Supplier Part Number 1=1276-1838-1-ND, Tolerance=10%, Voltage Rating=100V, Case/Package=1206, Category="Ceramic Capacitors", ComponentLink1Description=https://datasheet.ciiva.com/25711/cl31b105kchnnne-25711248.pdf?src-supplier=Digi-Key, ComponentLink1URL=https://datasheet.ciiva.com/25711/cl31b105kchnnne-25711248.pdf?src-supplier=Digi-Key, ComponentLink2Description=https://datasheet.ciiva.com/16437/clseries-16437207.pdf?src-supplier=Future+Electronics, ComponentLink2URL=https://datasheet.ciiva.com/16437/clseries-16437207.pdf?src-supplier=Future+Electronics, Contact Plating=Tin, Depth=1.6mm, Height=1.6mm, Length=3.2mm, Mount="Surface Mount", Packaging="Tape and Reel", Pricing 1="1=0.32000, 10=0.22100, 100=0.13260, 500=0.09942, 1000=0.08396 (USD)", Radiation Hardening=No, RoHS=Yes, Stock 1=981184, Supplier 1=Digi-Key, Thickness=0.071inch, Width=0.063inch
C9 C10 C12 C13 C15 C16: "2.2µF ±20% 100V Ceramic Capacitor X7R 1206 (3216 Metric)", Capacitance=2.2µF, Manufacturer 1="Murata Electronics North America", Manufacturer Part Number 1=GRM31CR72A225MA73L, Operating Temperature="-55°C ~ 125°C", Package / Case="1206 (3216 Metric)", Ratings=-, Supplier Part Number 1=490-12773-1-ND, Temperature Coefficient=X7R, Tolerance=±20%, Voltage=100V, ComponentLink1Description=http://www.murata.com/~/media/webrenewal/support/library/catalog/products/capacitor/mlcc/c02e.ashx, ComponentLink1URL=http://www.murata.com/~/media/webrenewal/support/library/catalog/products/capacitor/mlcc/c02e.ashx, Height - Seated (Max)=-, Lead Spacing=-, Lead Style=-, Mounting Type="Surface Mount, MLCC", Packaging="Cut Tape (CT)", Part Status=Active, Size / Dimension="0.126\" L x 0.063\" W (3.20mm x 1.60mm)", Supplier 1=Digi-Key, Thickness (Max)="0.071\" (1.80mm)"
C11 C24 C29 C33 C37 C42 C45 C51: "Cap Ceramic 0.1uF 25V X7R 10% SMD 0402 125C Paper T/R", Capacitance=100nF, Case Code (Imperial)=0402, Case Code (Metric)=1005, Dielectric=X7R, Dielectric Material=Ceramic, Manufacturer=Murata, Manufacturer Part Number=GRM155R71E104KE14D, Max Operating Temperature=125°C, Min Operating Temperature=-55°C, Package Quantity=10000, Supplier Part Number 1=490-10698-1-ND, Tolerance=10%, Voltage=25V, Case/Package=0402, Category="Ceramic Capacitors", ComponentLink1Description=http://www.farnell.com/datasheets/2048008.pdf?src-supplier=Farnell, ComponentLink1URL=http://www.farnell.com/datasheets/2048008.pdf?src-supplier=Farnell, ComponentLink2Description=http://uk.rs-online.com/webdocs/144c/0900766b8144c113.pdf?src-supplier=RSComponents, ComponentLink2URL=http://uk.rs-online.com/webdocs/144c/0900766b8144c113.pdf?src-supplier=RSComponents, ComponentLink3Description=http://www.farnell.com/datasheets/1872206.pdf?src-supplier=Farnell, ComponentLink3URL=http://www.farnell.com/datasheets/1872206.pdf?src-supplier=Farnell, ComponentLink4Description=http://components.arrow.com/part/dataview/0323_06361249?src-supplier=Arrow+Europe, ComponentLink4URL=http://components.arrow.com/part/dataview/0323_06361249?src-supplier=Arrow+Europe, ComponentLink5Description=http://www.mouser.com/ds/2/281/c02e-2905.pdf?src-supplier=Mouser, ComponentLink5URL=http://www.mouser.com/ds/2/281/c02e-2905.pdf?src-supplier=Mouser, ComponentLink6Description=http://www.farnell.com/datasheets/2048008.pdf?src-supplier=Newark, ComponentLink6URL=http://www.farnell.com/datasheets/2048008.pdf?src-supplier=Newark, ComponentLink7Description=http://psearch.en.murata.com/capacitor/product/GRM155R71E104KE14%23.pdf?src-supplier=Avnet, ComponentLink7URL=http://psearch.en.murata.com/capacitor/product/GRM155R71E104KE14%23.pdf?src-supplier=Avnet, ComponentLink8Description=https://search.murata.co.jp/Ceramy/image/img/A01X/G101/ENG/GRM155R71E104KE14-01.pdf?src-supplier=Digi-Key, ComponentLink8URL=https://search.murata.co.jp/Ceramy/image/img/A01X/G101/ENG/GRM155R71E104KE14-01.pdf?src-supplier=Digi-Key, ComponentLink9Description=http://www.farnell.com/datasheets/2048008.pdf?src-supplier=Element14, ComponentLink9URL=http://www.farnell.com/datasheets/2048008.pdf?src-supplier=Element14, Composition=Ceramic, Depth=0.5mm, Height=0.5mm, Lead Free="Lead Free", Length=1mm, Mount="Surface Mount", Packaging="Tape and Reel", Pricing 1="1=0.10000, 10=0.03400, 100=0.01520, 500=0.01088, 1000=0.00855, 2500=0.00778, 5000=0.00715 (USD)", REACH SVHC=Unknown, RoHS=Yes, Stock 1=785540, Supplier 1=Digi-Key, Termination=SMD/SMT, Thickness=0.022inch, Voltage Rating=25V, Voltage Rating (DC)=25V, Weight=0.000212oz, Width=0.02inch
C17: "10000pF ±5% 50V Ceramic Capacitor U2J 0603 (1608 Metric)", Capacitance=10000pF, Manufacturer 1=KEMET, Manufacturer Part Number 1=C0603C103J5JAC7867, Operating Temperature="-55°C ~ 125°C", Package / Case="0603 (1608 Metric)", Ratings=-, Supplier Part Number 1=399-13384-1-ND, Temperature Coefficient=U2J, Tolerance=±5%, Voltage=50V, ComponentLink1Description=http://www.kemet.com/docfinder?Partnumber=C0603C103J5JAC7867, ComponentLink1URL=http://www.kemet.com/docfinder?Partnumber=C0603C103J5JAC7867, Failure Rate=-, Height - Seated (Max)=-, Lead Spacing=-, Lead Style=-, Mounting Type="Surface Mount, MLCC", Packaging="Cut Tape (CT)", Part Status=Active, Size / Dimension="0.063\" L x 0.032\" W (1.60mm x 0.80mm)", Supplier 1=Digi-Key, Thickness (Max)="0.034\" (0.87mm)"
C20: "Cap Ceramic 27pF 100V C0G 5% SMD 0603 125C Paper T/R", Capacitance=27pF, Case Code (Imperial)=0603, Case Code (Metric)=1608, Dielectric=C0G, Insulation Resistance=10GR, Manufacturer=Yageo, Manufacturer Part Number=CC0603JRNPO0BN270, Max Operating Temperature=125°C, Min Operating Temperature=-55°C, Supplier Part Number 1=311-1757-1-ND, Tolerance=5%, Voltage Rating=100V, Case/Package=0603, Category="Ceramic Capacitors", ComponentLink1Description=http://www.mouser.com/ds/2/447/Yageo_UPY-GP_NP0_16V-to-50V_9-358835.pdf?src-supplier=Mouser, ComponentLink1URL=http://www.mouser.com/ds/2/447/Yageo_UPY-GP_NP0_16V-to-50V_9-358835.pdf?src-supplier=Mouser, ComponentLink2Description=http://components.arrow.com/part/dataview/0323_00784682?src-supplier=Arrow+Europe, ComponentLink2URL=http://components.arrow.com/part/dataview/0323_00784682?src-supplier=Arrow+Europe, ComponentLink3Description=http://www.yageo.com/documents/recent/UPY-NP0X7R_MV_100-to-630V_21.pdf?src-supplier=Digi-Key, ComponentLink3URL=http://www.yageo.com/documents/recent/UPY-NP0X7R_MV_100-to-630V_21.pdf?src-supplier=Digi-Key, ComponentLink4Description=http://www.yageo.com/documents/recent/UPY-GP_NP0_16V-to-50V_16.pdf?src-supplier=Future+Electronics, ComponentLink4URL=http://www.yageo.com/documents/recent/UPY-GP_NP0_16V-to-50V_16.pdf?src-supplier=Future+Electronics, Composition=Ceramic, Depth=0.8mm, Lead Free="Lead Free", Length=0.063inch, Mount="Surface Mount", Packaging="Tape and Reel", Pricing 1="1=0.10000, 10=0.06400, 100=0.02870, 500=0.02048, 1000=0.01609 (USD)", RoHS=Yes, Stock 1=38025, Supplier 1=Digi-Key, Termination=SMD/SMT, Thickness=0.035inch, Voltage Rating (DC)=100V, Weight=7.1E-05oz, Width=0.031inch
C21 C22: "0.1µF ±10% 100V Ceramic Capacitor X7R 0805 (2012 Metric)", Capacitance=0.1µF, Manufacturer 1="Murata Electronics North America", Manufacturer Part Number 1=GCM21BR72A104KA37L, Operating Temperature="-55°C ~ 125°C", Package / Case="0805 (2012 Metric)", Ratings=AEC-Q200, Supplier Part Number 1=490-4789-1-ND, Temperature Coefficient=X7R, Tolerance=±10%, Voltage=100V, ComponentLink1Description=http://www.murata.com/~/media/webrenewal/support/library/catalog/products/capacitor/mlcc/c03e.ashx, ComponentLink1URL=http://www.murata.com/~/media/webrenewal/support/library/catalog/products/capacitor/mlcc/c03e.ashx, Height - Seated (Max)=-, Lead Spacing=-, Lead Style=-, Mounting Type="Surface Mount, MLCC", Packaging="Cut Tape (CT)", Part Status=Active, Size / Dimension="0.079\" L x 0.049\" W (2.00mm x 1.25mm)", Supplier 1=Digi-Key, Thickness (Max)="0.055\" (1.40mm)"
C27: "CAP ,MLCC ,0402,6.3V,X7R,0.47uF, 10% ,T&R;", Capacitance=470nF, Case/Package=0402, Manufacturer="Taiyo Yuden", Manufacturer Part Number=LMK105B7474KV-F, Max Operating Temperature=125°C, Min Operating Temperature=-55°C, Supplier Part Number 1=587-5912-1-ND, Tolerance=10%, Voltage Rating=10V, Category="Ceramic Capacitors", ComponentLink1Description=http://www.yuden.co.jp/productdata/catalog/en/mlcc_all_e.pdf?src-supplier=Digi-Key, ComponentLink1URL=http://www.yuden.co.jp/productdata/catalog/en/mlcc_all_e.pdf?src-supplier=Digi-Key, ComponentLink2Description=http://ds.yuden.co.jp/TYCOMPAS/ut/detail.do?productNo=LMK105B7474KV-F&fileName=LMK105B7474KV-F_SS&mode=specSheetDownload&src-supplier=Digi-Key, ComponentLink2URL=http://ds.yuden.co.jp/TYCOMPAS/ut/detail.do?productNo=LMK105B7474KV-F&fileName=LMK105B7474KV-F_SS&mode=specSheetDownload&src-supplier=Digi-Key, ComponentLink3Description=https://www.yuden.co.jp/productdata/catalog/mlcc01_e.pdf?src-supplier=Digi-Key, ComponentLink3URL=https://www.yuden.co.jp/productdata/catalog/mlcc01_e.pdf?src-supplier=Digi-Key, Halogen Free="Halogen Free", Length=0.039inch, Mount="Surface Mount", Packaging="Tape and Reel", Pricing 1="1=0.25000, 10=0.17500, 100=0.09890, 500=0.06982, 1000=0.06110, 2500=0.05819, 5000=0.05383 (USD)", RoHS=Yes, Stock 1=68675, Supplier 1=Digi-Key, Thickness=0.022inch, Voltage Rating (DC)=10V, Width=0.02inch
C28: "Cap Ceramic 20pF 50V C0G 5% SMD 0402 125C Paper T/R", Capacitance=20pF, Case Code (Imperial)=0402, Case Code (Metric)=1005, Dielectric=C0G, Manufacturer=Samsung, Manufacturer Part Number=CL05C200JB5NNNC, Max Operating Temperature=125°C, Min Operating Temperature=-55°C, Package Quantity=1, Supplier Part Number 1=1276-1661-1-ND, Tolerance=5%, Voltage Rating=50V, Case/Package=0402, Category="Ceramic Capacitors", ComponentLink1Description=https://datasheet.ciiva.com/25782/cl05c200jb5nnnc-25782785.pdf?src-supplier=Digi-Key, ComponentLink1URL=https://datasheet.ciiva.com/25782/cl05c200jb5nnnc-25782785.pdf?src-supplier=Digi-Key, ComponentLink2Description=https://datasheet.ciiva.com/16428/cl05c200jb5nnnc-16428806.pdf?src-supplier=Future+Electronics, ComponentLink2URL=https://datasheet.ciiva.com/16428/cl05c200jb5nnnc-16428806.pdf?src-supplier=Future+Electronics, ComponentLink3Description=https://datasheet.ciiva.com/26838/getdatasheetpartid-729190-26838291.pdf?src-supplier=Verical, ComponentLink3URL=https://datasheet.ciiva.com/26838/getdatasheetpartid-729190-26838291.pdf?src-supplier=Verical, Contact Plating=Tin, Depth=0.5mm, Height=0.5mm, Length=1mm, Mount="Surface Mount", Packaging="Tape and Reel", Pricing 1="1=0.10000, 10=0.03300, 100=0.01480, 500=0.01058, 1000=0.00831, 2500=0.00755, 5000=0.00695 (USD)", Radiation Hardening=No, RoHS=Yes, Stock 1=2241047, Supplier 1=Digi-Key, Thickness=0.022inch, Width=0.02inch
C30 C32 C38: "MURATA - GCM155R71E103KA37D - SMD Vícevrstvý Keramický Kondenzátor, 10000 pF, 25 V, 0402 [1005 Metrické], ± 10%, X7R, Série GCM", Capacitance=10nF, Case Code (Imperial)=0402, Case Code (Metric)=1005, Dielectric=X7R, Manufacturer=Murata, Manufacturer Part Number=GCM155R71E103KA37D, Max Operating Temperature=125°C, Min Operating Temperature=-55°C, Package Quantity=1, Ratings=AEC-Q200, Supplier Part Number 1=490-6043-1-ND, Tolerance=10%, Voltage=25V, Case/Package=0402, Category="Ceramic Capacitors", ComponentLink1Description=https://datasheet.ciiva.com/26889/getdatasheetpartid-712285-26889130.pdf?src-supplier=Verical, ComponentLink1URL=https://datasheet.ciiva.com/26889/getdatasheetpartid-712285-26889130.pdf?src-supplier=Verical, ComponentLink2Description=https://datasheet.ciiva.com/11787/0900766b80ef92d0-11787083.pdf?src-supplier=RSComponents, ComponentLink2URL=https://datasheet.ciiva.com/11787/0900766b80ef92d0-11787083.pdf?src-supplier=RSComponents, ComponentLink3Description=https://datasheet.ciiva.com/6270/s0717e-6270940.pdf?src-supplier=Digi-Key, ComponentLink3URL=https://datasheet.ciiva.com/6270/s0717e-6270940.pdf?src-supplier=Digi-Key, ComponentLink4Description=https://datasheet.ciiva.com/6270/s0717e-6270942.pdf?src-supplier=Digi-Key, ComponentLink4URL=https://datasheet.ciiva.com/6270/s0717e-6270942.pdf?src-supplier=Digi-Key, Depth=0.5mm, Height=0.5mm, Lead Free="Lead Free", Length=1mm, Mount="Surface Mount", Packaging="Tape and Reel", Pricing 1="1=0.10000, 10=0.04700, 100=0.02080, 500=0.01488, 1000=0.01169, 2500=0.01063, 5000=0.00978 (USD)", Radiation Hardening=No, REACH SVHC="No SVHC", RoHS=Yes, Stock 1=4613622, Supplier 1=Digi-Key, Termination=SMD/SMT, Thickness=0.022inch, Voltage Rating=25V, Voltage Rating (DC)=25V, Width=0.02inch
C34 C35 C36 C43 C44: "22µF ±10% 6.3V Ceramic Capacitor X7R 1206 (3216 Metric)", Capacitance=22µF, Manufacturer 1="Murata Electronics North America", Manufacturer Part Number 1=GRM31CR70J226KE19L, Operating Temperature="-55°C ~ 125°C", Package / Case="1206 (3216 Metric)", Ratings=-, Supplier Part Number 1=490-6515-1-ND, Temperature Coefficient=X7R, Tolerance=±10%, Voltage=6.3V, ComponentLink1Description=http://www.murata.com/~/media/webrenewal/support/library/catalog/products/capacitor/mlcc/c02e.ashx, ComponentLink1URL=http://www.murata.com/~/media/webrenewal/support/library/catalog/products/capacitor/mlcc/c02e.ashx, Height - Seated (Max)=-, Lead Spacing=-, Lead Style=-, Mounting Type="Surface Mount, MLCC", Packaging="Cut Tape (CT)", Part Status=Active, Size / Dimension="0.126\" L x 0.063\" W (3.20mm x 1.60mm)", Supplier 1=Digi-Key, Thickness (Max)="0.071\" (1.80mm)"
C48 C49: "2.2µF ±10% 25V Ceramic Capacitor X5R 0603 (1608 Metric)", Capacitance=2.2µF, Manufacturer 1="Murata Electronics North America", Manufacturer Part Number 1=GRM188R61E225KA12D, Operating Temperature="-55°C ~ 85°C", Package / Case="0603 (1608 Metric)", Ratings=-, Supplier Part Number 1=490-10731-1-ND, Temperature Coefficient=X5R, Tolerance=±10%, Voltage=25V, ComponentLink1Description=http://www.murata.com/~/media/webrenewal/support/library/catalog/products/capacitor/mlcc/c02e.ashx, ComponentLink1URL=http://www.murata.com/~/media/webrenewal/support/library/catalog/products/capacitor/mlcc/c02e.ashx, Height - Seated (Max)=-, Lead Spacing=-, Lead Style=-, Mounting Type="Surface Mount, MLCC", Packaging="Cut Tape (CT)", Part Status=Active, Size / Dimension="0.063\" L x 0.031\" W (1.60mm x 0.80mm)", Supplier 1=Digi-Key, Thickness (Max)="0.035\" (0.90mm)"
D1: "17V Clamp 5A (8/20µs) Ipp Tvs Diode Surface Mount SOT-23-6", Breakdown Voltage=6V, Capacitance=3.5pF, Case/Package=SOT-23, Clamping Voltage=17V, Leakage Current=150nA, Manufacturer 1=STMicroelectronics, Manufacturer Part Number 1=USBLC6-2SC6, Max Operating Temperature=125°C, Min Operating Temperature=-40°C, Operating Supply Voltage=1.1V, Package Quantity=3000, Peak Pulse Current=5A, Power Line Protection=Yes, Reverse Standoff Voltage=5.25V, Supplier Part Number 1=497-5235-1-ND, Test Current=1mA, Working Voltage=5V, ComponentLink1Description=https://datasheet.ciiva.com/1268/1690354-1268384.pdf?src-supplier=Element14, ComponentLink1URL=https://datasheet.ciiva.com/1268/1690354-1268384.pdf?src-supplier=Element14, ComponentLink2Description=https://datasheet.ciiva.com/4508/cd00050750-113117-4508433.pdf?src-supplier=Mouser, ComponentLink2URL=https://datasheet.ciiva.com/4508/cd00050750-113117-4508433.pdf?src-supplier=Mouser, ComponentLink3Description=https://datasheet.ciiva.com/15143/getdatasheetpartid-148465-15143789.pdf?src-supplier=Verical, ComponentLink3URL=https://datasheet.ciiva.com/15143/getdatasheetpartid-148465-15143789.pdf?src-supplier=Verical, ComponentLink4Description=https://datasheet.ciiva.com/26787/usblc6-2sc6-26787908.pdf?src-supplier=IIIC, ComponentLink4URL=https://datasheet.ciiva.com/26787/usblc6-2sc6-26787908.pdf?src-supplier=IIIC, ComponentLink5Description=https://datasheet.ciiva.com/16200/cd00050750-16200026.pdf?src-supplier=Future+Electronics, ComponentLink5URL=https://datasheet.ciiva.com/16200/cd00050750-16200026.pdf?src-supplier=Future+Electronics, ComponentLink6Description=https://datasheet.ciiva.com/41444/001184109-da-01-en-ic-esd-protecti-usblc6-2sc6-sot-23-6-stm-41444156.pdf?src-supplier=Conrad, ComponentLink6URL=https://datasheet.ciiva.com/41444/001184109-da-01-en-ic-esd-protecti-usblc6-2sc6-sot-23-6-stm-41444156.pdf?src-supplier=Conrad, Contact Plating=Tin, Data Rate=480Mbps, Depth=1.75mm, Direction=Unidirectional, Element Configuration=Dual, ESD Protection=Yes, Height=1.3mm, Lead Free="Lead Free", Length=3.05mm, Max Breakdown Voltage=6V, Max Reverse Leakage Current=150nA, Min Breakdown Voltage=6V, Mount="Surface Mount", Number of Bidirectional Channels=2, Number of Channels=2, Number of Elements=1, Number of Pins=6, Packaging="Tape and Reel", Polarity=Unidirectional, Pricing 1="1=0.47000, 10=0.39900, 100=0.29820, 500=0.23430, 1000=0.18105 (USD)", Radiation Hardening=No, REACH SVHC="No SVHC", Reverse Breakdown Voltage=6V, RoHS=Yes, Stock 1=7579, Supplier 1=Digi-Key, Termination=SMD/SMT, Width=1.75mm
D2 D3 D4: Average Rectified Current=1A, Manufacturer=MCC, Manufacturer Part Number=SL110PL-TP, Max Reverse Voltage (DC)=100V, Supplier Part Number 1=SL110PL-TPMSCT-ND, Category="Rectifier Diodes", ComponentLink1Description=http://www.mccsemi.com/up_pdf/SL14PL-SL110PL(SOD-123FL)-A.pdf?src-supplier=Digi-Key, ComponentLink1URL=http://www.mccsemi.com/up_pdf/SL14PL-SL110PL(SOD-123FL)-A.pdf?src-supplier=Digi-Key, Mount="Surface Mount", Packaging="Tape and Reel", Pricing 1="1=0.33000, 10=0.24700, 100=0.11740, 500=0.09580, 1000=0.07107 (USD)", RoHS=Yes, Stock 1=10587, Supplier 1=Digi-Key
D5: "TVS DIODE 5V 9.1V DO214AA", Capacitance @ Frequency=-, Current - Peak Pulse (10/1000µs)=65.9A, Manufacturer="Vishay Semiconductor Diodes Division", Manufacturer Part Number=SMBJ5.0D-M3/H, Operating Temperature="-55°C ~ 150°C (TJ)", Package / Case="DO-214AA, SMB", Power - Peak Pulse=600W, Power Line Protection=No, Supplier Device Package="DO-214AA (SMBJ)", Supplier Part Number 1=SMBJ5.0D-M3/HGICT-ND, Voltage - Breakdown (Min)=6.5V, Voltage - Clamping (Max) @ Ipp=9.1V, Voltage - Reverse Standoff (Typ)=5V, Applications="General Purpose", Category="Circuit Protection", ComponentLink1Description=http://www.vishay.com/docs/87606/87606.pdf, ComponentLink1URL=http://www.vishay.com/docs/87606/87606.pdf, Mounting Type="Surface Mount", Packaging="Cut Tape (CT)", Part Status=Active, Pricing 1="1=0.51, 10=0.416, 25=0.3808, 100=0.2833, 250=0.25668 (CAD)", RoHS="RoHS Compliant", Stock 1=6900, Supplier 1=Digi-Key, Type=Zener
F1: "2.5A 32V AC 32V DC Fuse Board Mount (Cartridge Style Excluded) Surface Mount 1206 (3216 Metric)", Case Code (Imperial)=1206, Case Code (Metric)=3216, Current Rating=2.5A, DC Cold Resistance=24mR, Manufacturer 1=Littelfuse, Manufacturer Part Number 1=046602.5NRHF, Max Operating Temperature=90°C, Min Operating Temperature=-55°C, Package Quantity=5000, Power Dissipation=192.5mW, Supplier Part Number 1=F6143CT-ND, Voltage Rating (AC)=32V, Approvals=UL, Case/Package=1206, ComponentLink1Description=https://datasheet.ciiva.com/303/littelfuse-fuse-466-303217.pdf?src-supplier=Digi-Key, ComponentLink1URL=https://datasheet.ciiva.com/303/littelfuse-fuse-466-303217.pdf?src-supplier=Digi-Key, ComponentLink2Description=https://datasheet.ciiva.com/18652/littelfuse-fuse-466-datasheet-pdf-18652469.pdf?src-supplier=Digi-Key, ComponentLink2URL=https://datasheet.ciiva.com/18652/littelfuse-fuse-466-datasheet-pdf-18652469.pdf?src-supplier=Digi-Key, ComponentLink3Description=https://datasheet.ciiva.com/16327/littelfuse-fuse-466-16327471.pdf?src-supplier=Future+Electronics, ComponentLink3URL=https://datasheet.ciiva.com/16327/littelfuse-fuse-466-16327471.pdf?src-supplier=Future+Electronics, Depth=1.52mm, Fuse Type="Board Mount (Cartridge Style Excluded)", Height=0.023inch, Housing Material=Ceramic, Lead Free="Lead Free", Length=3.18mm, Mount="Surface Mount", Packaging="Tape and Reel", Pricing 1="1=0.84000, 5=0.81200, 10=0.78700, 50=0.66180, 100=0.54930, 250=0.49940, 500=0.42450, 1000=0.37455 (USD)", RoHS=Yes, Stock 1=4995, Supplier 1=Digi-Key, Voltage Rating (DC)=32V, Width=0.06inch, Working Voltage=32V
F2: library part "FUSE 375MA 125VDC 1206", "FUSE BOARD MNT 375MA 125VAC/VDC", Case Code (Imperial)=1206, Case Code (Metric)=3216, Current Rating=375mA, DC Cold Resistance=350mR, Manufacturer=Littelfuse, Manufacturer Part Number=0466.375NR, Max Operating Temperature=90°C, Min Operating Temperature=-55°C, Package Quantity=5000, Resistance=690mR, Supplier Part Number 1=F1453CT-ND, Voltage Rating=125V, Approvals=CSA,UL, Body Material=Thermoplastic, Case/Package=1206, ComponentLink1Description=http://www.littelfuse.com/data/en/Data_Sheets/Littelfuse_Fuse_466.pdf, ComponentLink1URL=http://www.littelfuse.com/data/en/Data_Sheets/Littelfuse_Fuse_466.pdf, ComponentLink2Description=http://www.littelfuse.com/~/media/electronics/datasheets/fuses/littelfuse_fuse_466_datasheet.pdf.pdf, ComponentLink2URL=http://www.littelfuse.com/~/media/electronics/datasheets/fuses/littelfuse_fuse_466_datasheet.pdf.pdf, ComponentLink3Description=//media.digikey.com/pdf/Data%20Sheets/Littelfuse%20PDFs/466%20Series%20Drawing.pdf, ComponentLink3URL=//media.digikey.com/pdf/Data%20Sheets/Littelfuse%20PDFs/466%20Series%20Drawing.pdf, ComponentLink4Description=http://www.farnell.com/datasheets/48294.pdf, ComponentLink4URL=http://www.farnell.com/datasheets/48294.pdf, ComponentLink5Description=https://www.verical.com/server-webapp/html/getDatasheet?partID=134212, ComponentLink5URL=https://www.verical.com/server-webapp/html/getDatasheet?partID=134212, Depth=1.52mm, Fuse Current=375mA, Fuse Type="Board Mount (Cartridge Style Excluded)", Height=0.023inch, Housing Material=Ceramic, Lead Free="Lead Free", Length=3.18mm, Mount="Surface Mount", Number of Pins=2, Packaging="Tape and Reel", Pricing 1="1=0.84, 5=0.812, 10=0.787, 50=0.6618, 100=0.5493, 250=0.4994, 500=0.4245, 1000=0.37455 (USD)", Radiation Hardening=No, REACH SVHC=Unknown, Stock 1=22359, Supplier 1=Digi-Key, Terminal Material=Copper, Termination=SMD/SMT, Voltage Rating (AC)=125V, Voltage Rating (DC)=125V, Width=0.06inch, Working Voltage=125V